# Altium PCB audiometer.PcbDoc
Units mil, origin at the board's own origin, x right, y up, seen from the top; angles counter-clockwise.
Board outline 6000 x 4000 mil, 2 copper layers (Top Layer, Bottom Layer); 54 components, 38 nets, 230 pads, 0 vias.
Unrouted connection lines stored in the file: 101.
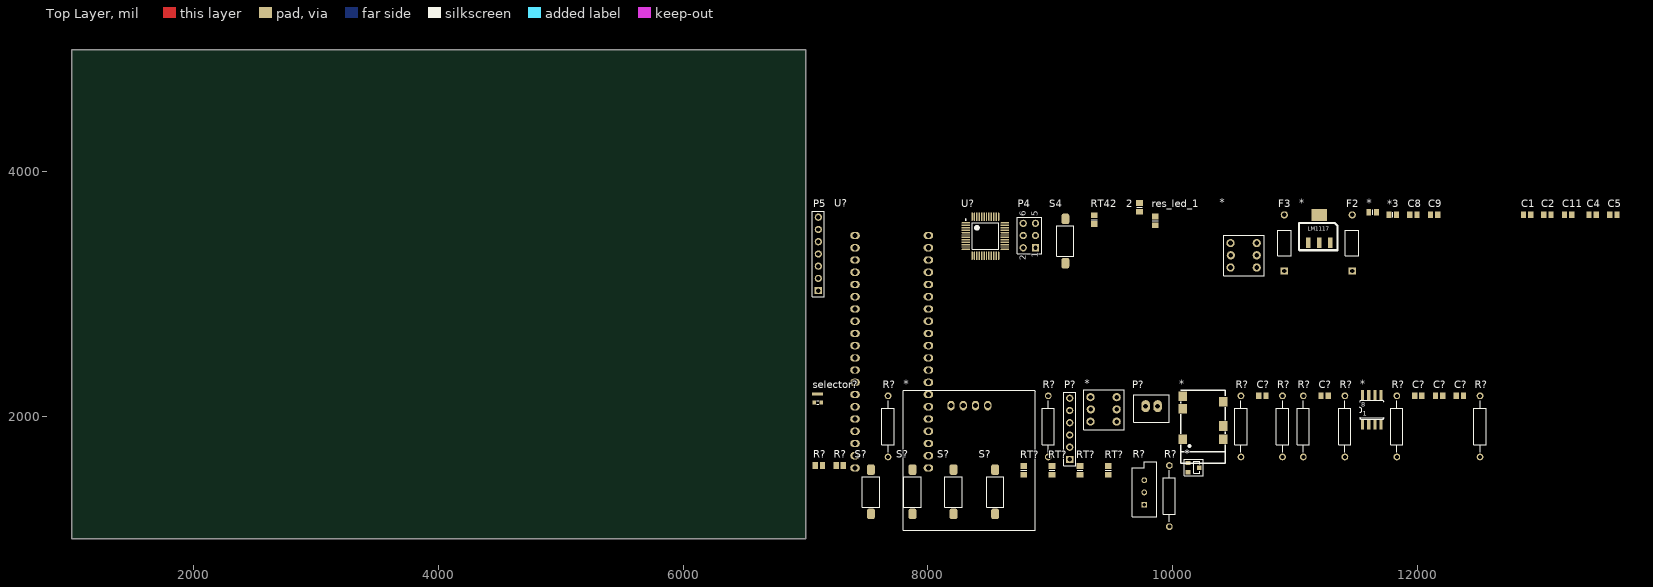
[diagram p0: Top Layer view]
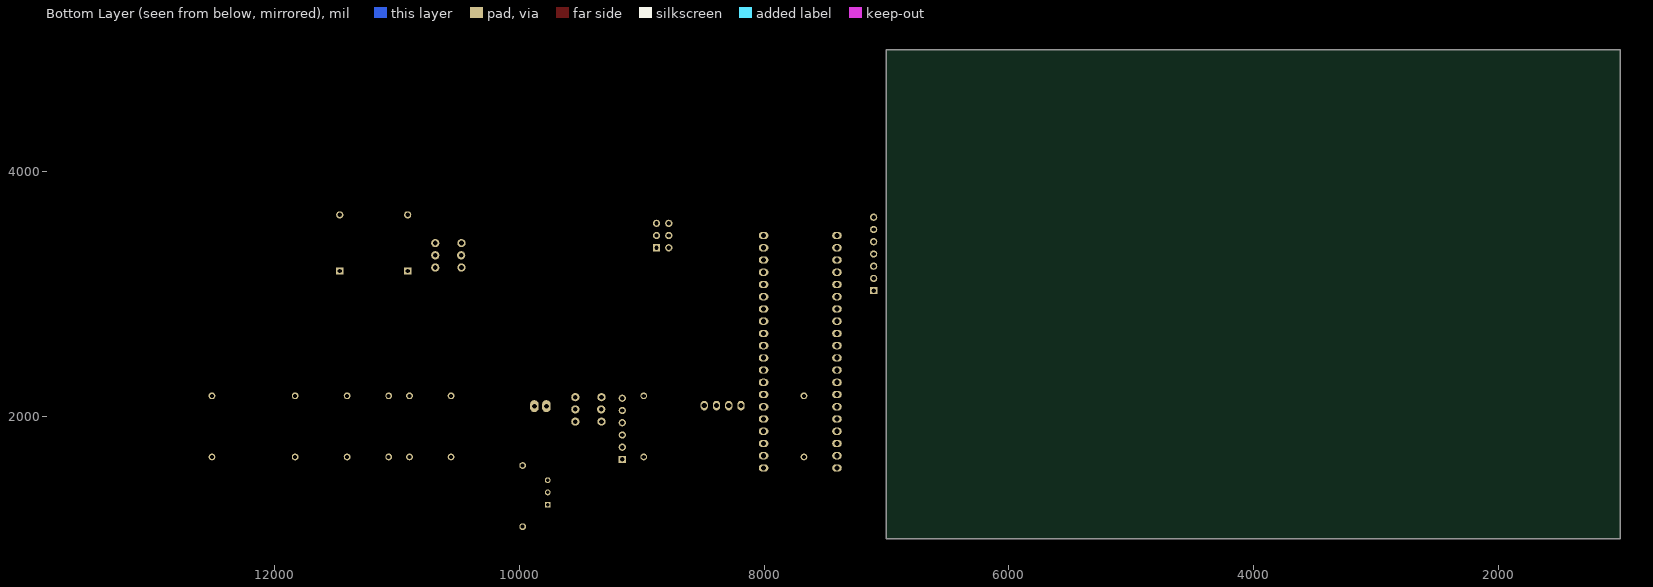
[diagram p1: Bottom Layer view, seen from below]

## Layer stack, top to bottom
Top Solder: solder mask 0.4, Solder Resist, Dk 3.5
Top Layer: signal copper 1.4
Dielectric 1: dielectric 12.6, FR-4, Dk 4.8
Bottom Layer: signal copper 1.4
Bottom Solder: solder mask 0.4, Solder Resist, Dk 3.5

## Board outline
1000,1000 7000,1000 7000,5000 1000,5000

## Design rules (kind name [scope] priority, off if disabled: settings)
Clearance [All] p1: gap=10 ignorepadtopadclearanceinfootprint=FALSE except(0: Arc-Hole Track-Hole SMDPad-Hole THPad-Hole Via-Hole Fill-Hole Poly-Hole Region-Hole Text-Hole)
PolygonConnect [All] p1: connectstyle=Relief reliefconductorwidth=10 reliefentries=4 polygonreliefangle="90 Angle" airgapwidth=10
RoomDefinition audiometer [InComponentClass('audiometer')] p1: confinementstyle=ConfineIn formatcopy=TRUE lockcomponents=FALSE outline 7045,1065 13675,1065 13675,3790 7045,3790
RoutingVias [All] p1: holewidth=28 width=50 viastyle="Through Hole" minholewidth=28 minwidth=50 maxholewidth=28 maxwidth=50
SolderMaskExpansion [All] p1: expansion=4 istentingtop=FALSE
Width [All] p1: maxlimit=10 minlimit=10 preferedwidth=10
30 further rules are at their usual default settings.

## Classes and differential pairs
component class audiometer: 1 2 3 * *1 *3 C1 C2 C3 C4 C5 C6 C7 C8 C9 C11 C? f1 F2 F3 L1 P4 P5 P? PP1 R? res_led_1 RT42 RT? S4 S? selector? U1 U4 U?

## Components (designator, comment, footprint, x,y, rotation, side; value= is the part's Value field where it differs from the comment)
2 "Res Thermal" 6-0805_N 9730,3710 r90 top
* "S_N_MOS" F_N_MOS_SOT23a 10165,1585 r0 top
* "S_jack3.5" F_JACK3.5 10325,1935 r90 top
* "S_OLED" F_OLED 8490,2090 r0 top
* "S_TDA1308" F_TDA1308_so8 11645,2060 r0 top
* "S_key6pin" F_key6pin 9435,2065 r0 top
* "S_LM1117" F_LM1117 11180,3525 r0 top
* "S_LED_smd" F_LED_805 11635,3675 r0 top
* "S_key6pin" F_key6pin 10580,3325 r0 top
*3 "S_LED_smd" F_LED_805 11800,3655 r0 top
C1 "Cap Pol3" C0805 12900,3650 r0 top value=100pF
C2 "Cap Pol3" C0805 13065,3650 r0 top value=100pF
C4 "Cap Pol3" C0805 13435,3650 r0 top value=100pF
C5 "Cap Pol3" C0805 13605,3650 r0 top value=100pF
C8 "Cap Pol3" C0805 11970,3650 r0 top value=100pF
C9 "Cap Pol3" C0805 12140,3650 r0 top value=100pF
C11 "Cap Pol3" C0805 13235,3650 r0 top value=100pF
C? "Cap Pol3" C0805 12350,2170 r0 top value=100uf
C? "Cap Pol3" C0805 12010,2170 r0 top value=100uf
C? "Cap Pol3" C0805 12180,2170 r0 top value=22uf
C? "Cap Pol3" C0805 10735,2170 r0 top value=1uf
C? "Cap Pol3" C0805 11245,2170 r0 top value=1uf
F2 "Fuse 2" PIN-W2/E2.8 11470,3420 r90 top
F3 "Fuse 2" PIN-W2/E2.8 10915,3420 r90 top
P4 "Header 3X2" HDR2X3 8880,3380 r90 top
P5 "Header 7" HDR1X7 7105,3030 r90 top
P? "Header 6" HDR1X6 9160,1650 r90 top
P? "MHDR1X2" "JST XH B2B-XH-A" 9830,2085 r0 top
R? "Res3" C0805 7280,1600 r0 top value=4.7K
R? "Res3" C0805 7110,1600 r0 top value=4.7K
R? "RPot" VR5 9770,1380 r90 top value=1K
R? "Res Semi" AXIAL-0.5 9975,1350 r90 top value=3.9k
R? "Res Semi" AXIAL-0.5 8985,1920 r90 top value=1K
R? "Res Semi" AXIAL-0.5 11835,1920 r90 top value=10K
R? "Res Semi" AXIAL-0.5 10560,1920 r90 top value=3.9k
R? "Res Semi" AXIAL-0.5 11410,1920 r90 top value=3.9k
R? "Res Semi" AXIAL-0.5 7675,1920 r90 top value=1K
R? "Res Semi" AXIAL-0.5 11070,1920 r90 top value=3.9k
R? "Res Semi" AXIAL-0.5 10900,1920 r90 top value=3.9k
R? "Res Semi" AXIAL-0.5 12515,1920 r90 top value=10K
res_led_1 "Res Thermal" 6-0805_N 9860,3600 r90 top
RT42 "Res Thermal" 6-0805_N 9360,3610 r90 top
RT? "Res Thermal" 6-0805_N 9245,1560 r90 top
RT? "Res Thermal" 6-0805_N 9475,1560 r90 top
RT? "Res Thermal" 6-0805_N 9015,1560 r90 top
RT? "Res Thermal" 6-0805_N 8785,1560 r90 top
S4 "SPST-NO" "TE FSMSMTR" 9125,3435 r0 top
S? "SPST-NO" "TE FSMSMTR" 7875,1385 r0 top
S? "SPST-NO" "TE FSMSMTR" 7535,1385 r0 top
S? "SPST-NO" "TE FSMSMTR" 8550,1385 r0 top
S? "SPST-NO" "TE FSMSMTR" 8210,1385 r0 top
selector? "S_SELECTOR" F_SELECTOR 7140,2055 r90 top
U? "STM32F103C8T6" F_STM32f103c8t6_blue_pill 7405,1580 r0 top
U? "STM32F103C8T6" STM-LQFP48_N 8470,3475 r0 top

## Footprints (in the part's own frame and the unit in brackets; to place one, negate y for a bottom-side part, rotate by r counter-clockwise, add the part's x,y. Pads: shape width x height; smd on the part's side, far side on the other; paste and mask are expansions set on the pad)
6-0805_N [mm] "Chip Resistor, Body 2.0x1.2mm, IPC Medium Density"
  rect 1.2x1.4 smd: 1(-0.9,0) 2(0.9,0)
  silkscreen extent 0,-0.6 0,0.6, body extent -1.07,-0.7 1.07,0.7, height 0.7
AXIAL-0.5 [mm] "Axial Device, Thru-Hole; 2 Leads; 0.5 in Pin Spacing"
  round 1.4 hole 0.85: 1(-6.35,0) 2(6.35,0)
  silkscreen extent -5.33,-1.27 5.33,1.27
C0805 [mm] "Chip Capacitor, Body 2.0x1.3mm, IPC High Density"
  rect 1.1x1.4 smd: 1(-0.75,0) 2(0.75,0)
  body extent -1.1,-0.72 1.1,0.72, height 1.4
F_JACK3.5 [mm]
  rect 2x1.75 smd: 1(-3.042,-2.302) 2(3.308,6.112) 3(-0.292,-2.302) 4(-3.042,6.112) 5(5.908,6.112) 6(4.758,-2.302)
  silkscreen extent -8,-2.67 7.11,6.48, body extent -8.03,-2.64 5.97,6.45, height 5.04
F_key6pin [mm]
  round 1.7 hole 0.962: 1(-2.665,2.383) 2(-2.601,-0.157) 3(-2.665,-2.697) 4(2.772,2.383) 5(2.772,-0.157) 6(2.772,-2.697)
  silkscreen extent -4.06,-4.41 4.32,3.97, body extent -4.13,-4.48 4.37,4.02, height 13.5
F_LED_805 [mm]
  rect 1x1.3 smd: 1(0.841,-0.127) 2(-0.759,-0.127)
  silkscreen extent 0.04,-0.68 0.04,0.42, body extent -0.96,-0.75 1.04,0.5, height 0.81
F_LM1117 [mm]
  rect 0.95x2.15 smd: 1(-1.778,-2.667) 2(0.522,-2.667) 3(2.822,-2.667)
  rect 3.25x2.45 smd: 2(0.522,3.133)
  silkscreen extent -3.68,-4.19 4.32,1.46, body extent -2.79,-2.99 3.71,4.01, height 1.85
F_N_MOS_SOT23a [mm]
  rect 0.95x0.9 smd: D(1.39,-0.06) G(-0.96,0.89) S(-0.96,-1.01)
  silkscreen extent -1.78,-1.78 2.16,1.65, body extent -1.12,-1.5 1.38,1.5, height 1.06
F_OLED [mm]
  oval 1.5x2 hole 1.1: 1(-7.62,0) 2(-5.08,0) 3(-2.54,0) 4(0,0)
  silkscreen extent -17.53,-25.91 9.91,3.17, body extent -17.16,-25.45 9.54,2.41, height 10.47
F_SELECTOR [mil]
  rect 35.43x27.56 smd: 1(60,69.53) 2(60,10.47)
  rect 27.56x90 smd: 3(130,40)
  silkscreen extent 46,32 74,48, body extent 57,-9 123,89, height 35
F_STM32f103c8t6_blue_pill [mm]
  oval 2x1.5 hole 1.1: 1(15.24,0) 2(15.24,2.54) 3(15.24,5.08) 4(15.24,7.62) 7(15.24,40.64) 8(15.24,45.72) 9(15.24,43.18) 10(15.24,10.16) 11(15.24,12.7) 12(15.24,15.24) 13(15.24,17.78) 14(15.24,20.32) 15(15.24,22.86) 16(15.24,25.4) 17(15.24,27.94) 18(15.24,30.48) 19(15.24,33.02) 21(15.24,35.56) 22(15.24,38.1) 23(15.24,48.26) 25(0,48.26) 26(0,45.72) 27(0,43.18) 28(0,40.64) 29(0,38.1) 30(0,35.56) 31(0,33.02) 32(0,30.48) 33(0,27.94) 38(0,25.4) 39(0,22.86) 40(0,20.32) 41(0,17.78) 42(0,15.24) 43(0,12.7) 45(0,10.16) 46(0,7.62) 47(0,2.54) 48(0,0) 555(0,5.08)
  body extent -3.81,-12.95 19.05,51.69, height 18.77
F_TDA1308_so8 [mil]
  rect 26x80 smd: 1(-90,-126) 2(-40,-126) 3(10,-126) 4(60,-126) 5(60,116) 6(10,116) 7(-40,116) 8(-90,116)
  silkscreen extent -115,-82 85,72, body extent -111,-118 81,118, height 67
HDR1X6 [mm] "Connector; Header; 6 Position"
  rect 1.5x1.5 hole 0.9: 1(0,0)
  round 1.5 hole 0.9: 2(2.54,0) 3(5.08,0) 4(7.62,0) 5(10.16,0) 6(12.7,0)
  silkscreen extent -1.27,-1.27 13.97,1.27
HDR1X7 [mm] "Connector; Header; 7 Position"
  rect 1.5x1.5 hole 0.9: 1(0,0)
  round 1.5 hole 0.9: 2(2.54,0) 3(5.08,0) 4(7.62,0) 5(10.16,0) 6(12.7,0) 7(15.24,0)
  silkscreen extent -1.27,-1.27 16.51,1.27
HDR2X3 [mm] "Connector; Header; 3x2 Position"
  rect 1.5x1.5 hole 0.9: 1(0,0)
  round 1.5 hole 0.9: 2(0,2.54) 3(2.54,0) 4(2.54,2.54) 5(5.08,0) 6(5.08,2.54)
  silkscreen extent -1.27,-1.27 6.35,3.81
"JST XH B2B-XH-A" [mm]
  oval 1.75x2.5 hole 1: 1(-1.25,0) 2(1.25,0)
  silkscreen extent -3.7,-3.38 3.7,2.38, body extent -3.7,-3.38 3.7,2.38, height 7
PIN-W2/E2.8 [mm] "Thru-Hole; 2 Leads"
  rect 1.5x1.5 hole 0.9: 1(-5.825,0)
  round 1.5 hole 0.9: 2(5.825,0)
  silkscreen extent -2.65,-1.4 2.65,1.4
STM-LQFP48_N [mm] "QFP, 48-Leads, Body 7x7mm, Pitch 0.5mm, IPC Medium Density"
  oval 1.8x0.3 smd: 1(-4.05,2.75) 2(-4.05,2.25) 3(-4.05,1.75) 4(-4.05,1.25) 5(-4.05,0.75) 6(-4.05,0.25) 7(-4.05,-0.25) 8(-4.05,-0.75) 9(-4.05,-1.25) 10(-4.05,-1.75) 11(-4.05,-2.25) 12(-4.05,-2.75) 25(4.05,-2.75) 26(4.05,-2.25) 27(4.05,-1.75) 28(4.05,-1.25) 29(4.05,-0.75) 30(4.05,-0.25) 31(4.05,0.25) 32(4.05,0.75) 33(4.05,1.25) 34(4.05,1.75) 35(4.05,2.25) 36(4.05,2.75)
  oval 0.3x1.8 smd: 13(-2.75,-4.05) 14(-2.25,-4.05) 15(-1.75,-4.05) 16(-1.25,-4.05) 17(-0.75,-4.05) 18(-0.25,-4.05) 19(0.25,-4.05) 20(0.75,-4.05) 21(1.25,-4.05) 22(1.75,-4.05) 23(2.25,-4.05) 24(2.75,-4.05) 37(2.75,4.05) 38(2.25,4.05) 39(1.75,4.05) 40(1.25,4.05) 41(0.75,4.05) 42(0.25,4.05) 43(-0.25,4.05) 44(-0.75,4.05) 45(-1.25,4.05) 46(-1.75,4.05) 47(-2.25,4.05) 48(-2.75,4.05)
  silkscreen extent -4.17,-2.75 2.75,3.57, body extent -3.5,-3.5 3.5,3.5, height 1.6
"TE FSMSMTR" [mm]
  rrect50% 1.6x2.19 smd: 1(0,4.595) 2(0,-4.595)
  silkscreen extent -1.78,-3.17 1.78,3.17, body extent -1.75,-4.98 1.75,4.98, height 4.42
VR5 [mm] "Thru-Hole; 3 Leads"
  rect 1.2x1.2 hole 0.7: 1(-2.54,0)
  round 1.2 hole 0.7: 2(0,0) 3(2.54,0)
  silkscreen extent -5.08,-2.54 6.35,2.54

## Part data
2 res_led_1 RT42 RT? RT? RT? RT?: "Thermistor", Code_IPC=RESC2012, LatestRevisionDate=29-May-2009, LatestRevisionNote="IPC-7351 Footprint Added.", PackageDescription="Chip Resistor 0805 Case Size", PackageReference=6-0805, PackageVersion=Mar-2003, Published=24-Mar-1999, Publisher="Altium Limited"
C1 C2 C4 C5 C8 C9 C11 C? C? C? C? C?: "Polarized Capacitor (Surface Mount)", LatestRevisionDate=29-May-2009, LatestRevisionNote="IPC-7351 Footprint Added.", PackageDescription="Chip Capacitor", PackageReference=C0805, Published=8-Jun-2000, Publisher="Altium Limited"
F2 F3: "Fuse", LatestRevisionDate=17-Jul-2002, LatestRevisionNote="Re-released for DXP Platform.", PackageDescription="Thru-Hole; 2 Leads", PackageReference=PIN-W2/E2.8, Published=8-Jun-2000, Publisher="Altium Limited"
P4: "Header, 3-Pin, Dual row", LatestRevisionDate=17-Jul-2002, LatestRevisionNote="Re-released for DXP Platform.", Publisher="Altium Limited"
P5: "Header, 7-Pin", LatestRevisionDate=17-Jul-2002, LatestRevisionNote="Re-released for DXP Platform.", Publisher="Altium Limited"
P?: "Header, 6-Pin", LatestRevisionDate=17-Jul-2002, LatestRevisionNote="Re-released for DXP Platform.", Publisher="Altium Limited"
P?: "Header, 2-Pin", LatestRevisionDate=17-Jul-2002, LatestRevisionNote="Re-released for DXP Platform.", Publisher="Altium Limited"
R? R?: "Resistor", LatestRevisionDate=29-May-2009, LatestRevisionNote="IPC-7351 Footprint Added.", PackageDescription="Chip Resistor", PackageReference=J1-0603, Published=8-Jun-2000, Publisher="Altium Limited"
R?: "Potentiometer", LatestRevisionDate=17-Jul-2002, LatestRevisionNote="Re-released for DXP Platform.", PackageDescription="Variable Resistor, Thru-Hole; 3 Leads", PackageReference=VR5, Published=8-Jun-2000, Publisher="Altium Limited", Set Position=0.5, Sim Note="Enter the Resistance value and the set point into parameter fields."
R? R? R? R? R? R? R? R? R?: "Semiconductor Resistor", LatestRevisionDate=17-Jul-2002, LatestRevisionNote="Re-released for DXP Platform.", PackageDescription="Axial Device, Thru-Hole; 2 Leads; 0.5 in Pin Spacing", PackageReference=AXIAL-0.5, Published=8-Jun-2000, Publisher="Altium Limited"
S4 S? S? S? S?: library part "SPST-NO 2 PIN"
U? U?: "ARM Cortex-M3 32-bit MCU, 64 KB Flash, 20 KB Internal RAM, 37 I/Os, 48-pin LQFP, -40 to 85 degC, Tray", I/Os (High Current)=37, Operating Frequency(F) (Processor speed) (MHz)=72, Supplier Part Number 1=497-6063-ND, Supply Voltage(Vcc) min (V)=2, A/D Converter="2x12-bit (10 Channel)", ComponentLink1Description="Manufacturer URL", ComponentLink1URL=http://www.st.com/web/en/home.html, ComponentLink2Description=Datasheet, ComponentLink2URL=http://www.st.com/st-web-ui/static/active/en/resource/technical/document/datasheet/CD00161566.pdf, ComponentLink3Description="Package Specification", ComponentLink3URL=http://www.st.com/st-web-ui/static/active/en/resource/technical/document/datasheet/DM00058181.pdf, Core="ARM Cortex-M3", DatasheetVersion="Rev. 16", FLASH Size (Prog) (kB)=64, Internal RAM Size (kB)=20, Mounting Technology="Surface Mount", PackageDescription="48-Pin Low Profile Quad Flat Package, 7 x 7 mm Body, 0.5 mm Pitch", PackageReference=LQFP48, PackageVersion="Rev. 6, 06/2013", Packing=Tray, PartNumber=STM32F103C8T6, Supplier 1=Digi-Key, Supplier 2=Farnell, Supplier 3=Newark, Supplier 4=Newark, Supplier 5=Mouser, Supplier Part Number 2=1447637, Supplier Part Number 3=59M2182, Supplier Part Number 4=57P1222, Supplier Part Number 5=511-STM32F103C8T6

## Nets (pads, with @x,y where several pads share a name; then routed paths per layer and width w, separated by ;. In a path a pad name is that pad's centre, name@x,y a point inside that pad or via, vN(x,y) a via of type N, cw(c..) or ccw(c..) an arc to the next point about the centre after c; other vN are vias at no path point)
+3.3: *3.2 C4.1 C5.1 C8.1 C9.1 F3.2 P4.1 P5.6 RT42.1 RT?.1 U?.1@8005,1580 U?.9@8005,3280 U?.48@7405,1580
+12: F2.2
buzzer: R?.2@7309.53,1600
feedback: 
FSYNC: P5.2 U?.14@8381.42,3315.55
GND: 2.2 *.1@8190,2090 *.1@11110,3420 *.4@10084.37,1815.24 *.4@11705,1934 *.S C1.2 C2.2 C4.2 C5.2 C8.2 C9.2 C11.2 C?.2@12209.53,2170 P4.5 P5.5 P?.1@9780.79,2085 P?.4 R?.1@7080.47,1600 R?.1@9975,1100 R?.1@11835,1670 res_led_1.2 S4.2 S?.2 selector?.2 U?.8@8005,3380 U?.23@8005,3480 U?.44 U?.47@7405,1680
KEY1: RT?.2@8785,1595.43 S?.1@7535,1565.91 U?.22@8538.9,3315.55
KEY2: RT?.2@9015,1595.43 S?.1@7875,1565.91 U?.21@8519.21,3315.55
KEY3: RT?.2@9245,1595.43 S?.1@8210,1565.91 U?.19@8479.84,3315.55
KEY4: RT?.2@9475,1595.43 S?.1@8550,1565.91 U?.18@8460.16,3315.55
MICRO_RX: P?.3 U?.31@8629.45,3484.84
MICRO_TX: P?.2@9160,1750 U?.30@8629.45,3465.16
MOSI: P5.4 U?.17@8440.47,3315.55
Net2_1: 2.1 *.1@11668.12,3670.01
Net*1_2: 
Net*3_1: *3.1 res_led_1.1
Net*_1: *.1@11555,1934 C?.1@12320.47,2170 R?.2@11410,2170
Net*_2: *.2@11200.55,3420 *.2@11200.55,3648.35 F3.1
Net*_3: *.3@10415.63,1923.5 *.6@10415.63,2122.32
Net*_6: *.6@11655,2176 R?.1@11070,1670 R?.2@10560,2170
Net*_7: *.7 C?.1@11980.47,2170 R?.2@11070,2170
Net*_G: *.G R?.2@9975,1600
Netbuzzer?_2: 
NetC?_1: C?.1@10705.47,2170 R?.1@10560,1670
NetF2_1: F2.1 P?.2@9879.21,2085
Netmosn?_G: R?.1@7250.47,1600 R?.2@7139.53,1600
NetP?_6: P?.6 selector?.3
NRST: P4.6 RT42.2 S4.1 U?.7@8310.55,3465.16
OUTA: C?.2@12379.53,2170
OUTB: C?.2@12039.53,2170
PULSE_OUT: C?.2@10764.53,2170 C?.2@11274.53,2170 P5.1
SCK: P5.3 U?.15@8401.1,3315.55
SCL: *.3@8390,2090 R?.1@7675,1670 U?.42@8479.84,3634.45
SDA: *.4@8490,2090 R?.1@8985,1670 U?.43@8460.16,3634.45
SWCLK: P4.4 U?.37
SWDIO: P4.2 U?.34
V_BIAS: *.3@11655,1934 *.5@11705,2176 C?.1@12150.47,2170 R?.1@12515,1670 R?.2@11835,2170
VCC: *.2@8290,2090 *.2@11605.13,3670.01 *.3@11291.1,3420 *.8 C1.1 C2.1 C11.1 P?.5 R?.2@7675,2170 R?.2@8985,2170 R?.2@12515,2170 selector?.1
pads on no net: *.1@9330.1,2158.82 *.1@10415.63,1815.24 *.1@10475.1,3418.82 *.2@9332.6,2058.82 *.2@10084.37,2065.24 *.2@10477.6,3318.82 *.2@11605,1934 *.3@9330.1,1958.82 *.3@10475.1,3218.82 *.4@9544.13,2158.82 *.4@10689.13,3418.82 *.5@9544.13,2058.82 *.5@10084.37,2167.6 *.5@10689.13,3318.82 *.6@9544.13,1958.82 *.6@10689.13,3218.82 *.D C?.1@11215.47,2170 P4.3 P5.7 P?.1@9160,1650 R?.1@9770,1280 R?.1@10900,1670 R?.1@11410,1670 R?.2@9770,1380 R?.2@10900,2170 R?.3 U?.1@8310.55,3583.27 U?.2 U?.3 U?.4 U?.5 U?.6 U?.7@8005,3180 U?.8@8310.55,3445.47 U?.9@8310.55,3425.79 U?.10 U?.11 U?.12 U?.13 U?.14@8005,2380 U?.15@8005,2480 U?.16 U?.17@8005,2680 U?.18@8005,2780 U?.19@8005,2880 U?.20 U?.21@8005,2980 U?.22@8005,3080 U?.23@8558.58,3315.55 U?.24 U?.25 U?.26 U?.27 U?.28 U?.29 U?.30@7405,2980 U?.31@7405,2880 U?.32 U?.33 U?.35 U?.36 U?.38 U?.39 U?.40 U?.41 U?.42@7405,2180 U?.43@7405,2080 U?.45 U?.46 U?.47@8381.42,3634.45 U?.48@8361.73,3634.45 U?.555

## Text inside footprints (layer, text, board x,y; h text height)
*: Top Overlay "8" at 11544.95,2080.01 h39.02; Top Overlay "1" at 11554.88,2004.92 h39.06
*: Top Overlay "LM1117" at 11105,3520 h31.5
P4: Top Overlay "6" at 8800,3640 h50 r90; Top Overlay "5" at 8900,3640 h50 r90; Top Overlay "2" at 8800,3280 h50 r90; Top Overlay "1" at 8900,3300 h50 r90